# Altium PCB PCB1.PcbDoc
Units mm, origin at the board's own origin, x right, y up, seen from the top; angles counter-clockwise.
Board outline 73.13 x 48.2 mm, 2 copper layers (Top Layer, Bottom Layer); 14 components, 11 nets, 39 pads, 0 vias.
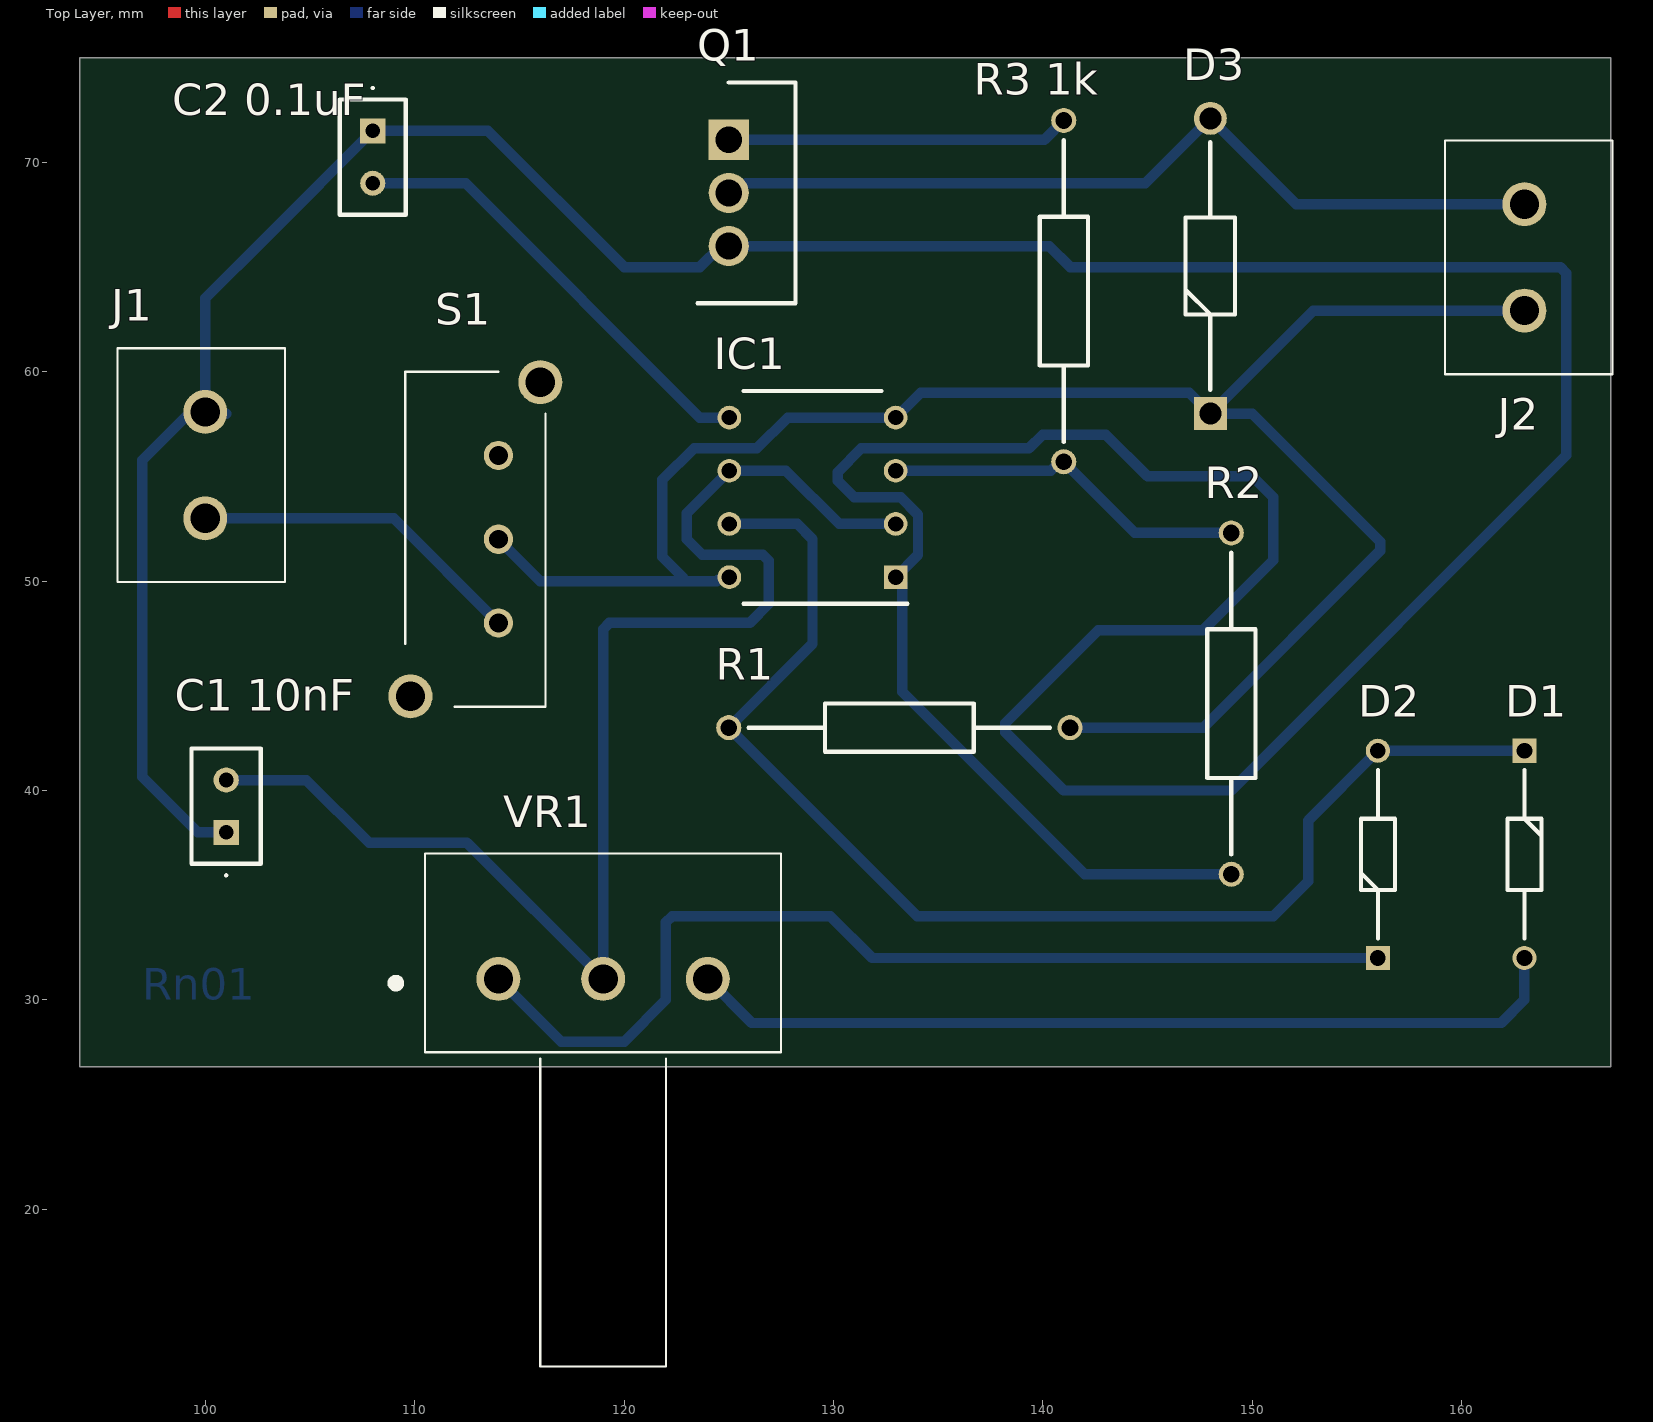
[diagram p0: Top Layer view]
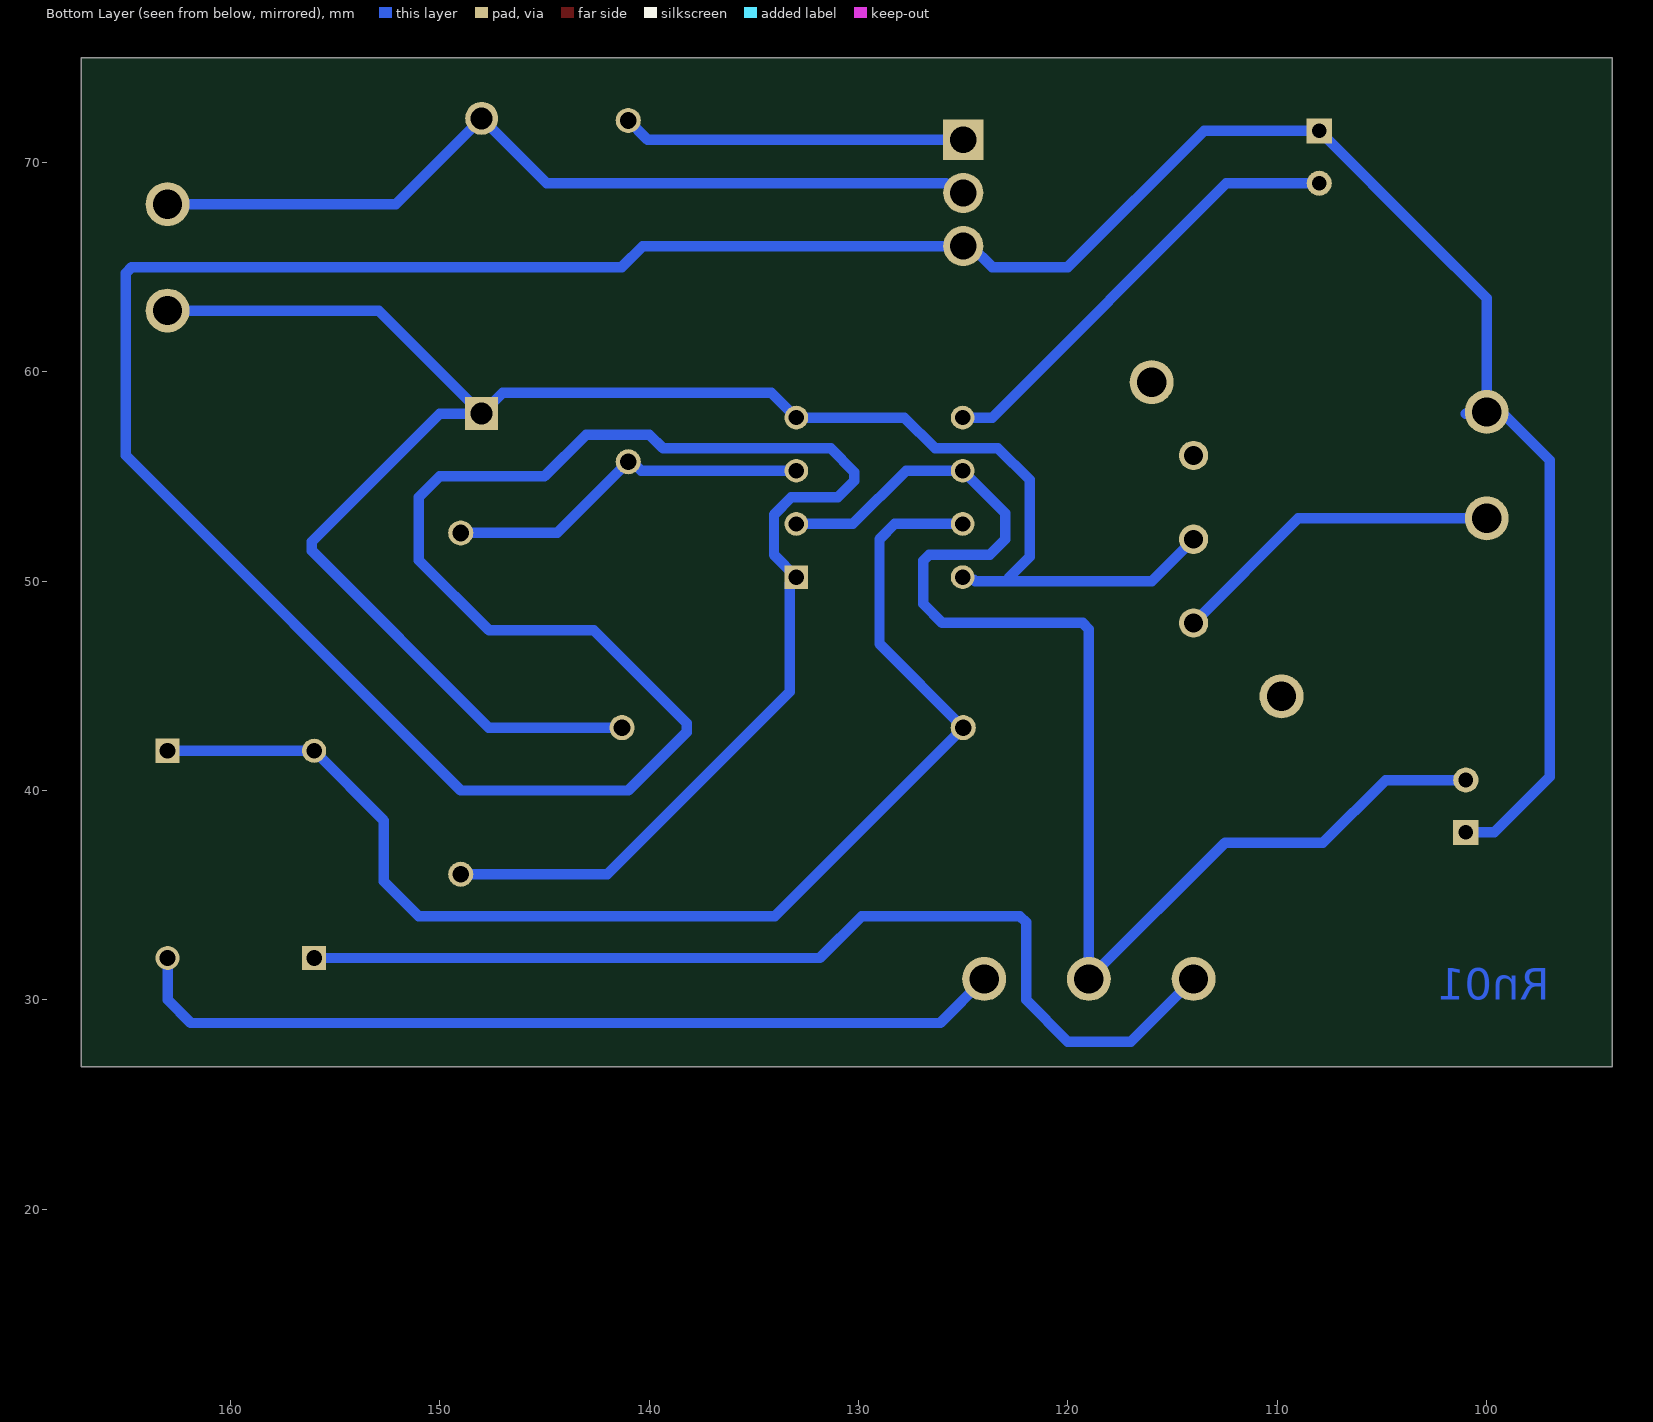
[diagram p1: Bottom Layer view, seen from below]
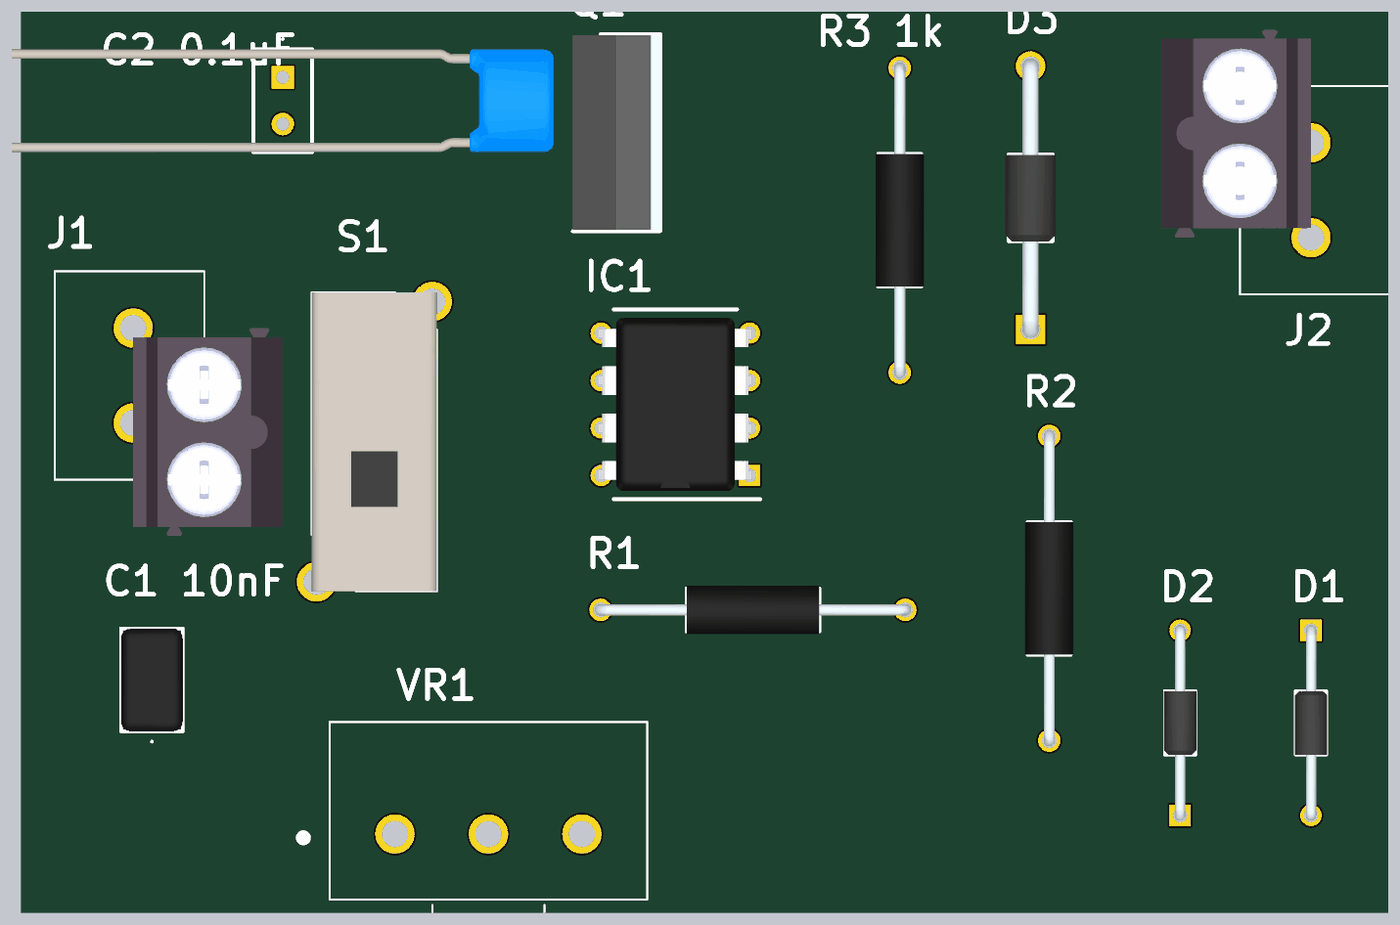
[diagram p2: 3D render of the assembled board from above, using the file's embedded part models]

## Layer stack, top to bottom
Top Solder: solder mask 0.0102, Solder Resist, Dk 3.5
Top Layer: signal copper 0.0356
Dielectric 1: dielectric 0.32, FR-4, Dk 4.8
Bottom Layer: signal copper 0.0356
Bottom Solder: solder mask 0.0102, Solder Resist, Dk 3.5

## Board outline
94,26.797 167.132,26.797 167.132,75 94,75

## Design rules (kind name [scope] priority, off if disabled: settings)
Clearance [All] p1: gap=0.254 ignorepadtopadclearanceinfootprint=FALSE
PolygonConnect [All] p1: connectstyle=Relief reliefconductorwidth=0.254 reliefentries=4 polygonreliefangle="90 Angle" airgapwidth=0.254
RoutingVias [All] p1: holewidth=0.711 width=1.27 viastyle="Through Hole" minholewidth=0.711 minwidth=1.27 maxholewidth=0.711 maxwidth=1.27
SilkToSolderMaskClearance [IsPad] p1: minsilkscreentomaskgap=0.1 clearancetoexposedcopper=TRUE
SolderMaskExpansion [All] p1: expansion=0.102 istentingtop=FALSE
SupplyNets "Schematic Supply Nets_1" [InNet('+12')] p1: voltage=0.000
SupplyNets "Schematic Supply Nets" [InNet('GND')] p2: voltage=0.000
Width [All] p1: maxlimit=1 minlimit=0.254 preferedwidth=0.5 minimp=50.000000 maximp=50.000000 favimp=50.000000
29 further rules are at their usual default settings.

## Components (designator, comment, footprint, x,y, rotation, side; value= is the part's Value field where it differs from the comment)
"C1 10nF" "RHS7J2D103J2DGH01A" RHS7J2D103J2DGH01A 101,38 r90 top
"C2 0.1uF" "RCE5C1H104J2A2H03B" RCE5C1H104J2A2H03B 108,71.5 r270 top
D1 "1N4148B" DIOAD990W55L340D162 163,41.9 r270 top
D2 "1N4148B" DIOAD990W55L340D162 156,32 r90 top
D3 "1N4007-T" DIOAD1408W86L464D236 148,58 r90 top
IC1 "LM555CN_NOPB" DIP794W53P254L959H508Q8N 129,54 r180 top
J1 "1760510000" 1760510000 100,58.08 r270 top
J2 "1760510000" 1760510000 163,62.92 r90 top
Q1 "IRFZ24NPBF" TO254P469X1042X1967-3P 125,71.08 r270 top
R1 "MF1_4DCT26A1001F" RESAD1630W60L710D230 125,43 r0 top
R2 "MF1_4DCT26A1001F" RESAD1630W60L710D230 149,52.3 r270 top
"R3 1k" "MF1_4DCT26A1001F" RESAD1630W60L710D230 141,55.7 r90 top
S1 "MHS12204" MHS12204 114,48 r270 top
VR1 "P160KN2-0EC15B50K" P160KN20EC15B50K 114,31 r0 top

## Footprints (in the part's own frame and the unit in brackets; to place one, negate y for a bottom-side part, rotate by r counter-clockwise, add the part's x,y. Pads: shape width x height; smd on the part's side, far side on the other; paste and mask are expansions set on the pad)
1760510000 [mm]
  round 2.1 hole 1.4: 1(0,0) 2(5.08,0)
  silkscreen extent -3.04,-4.2 8.12,3.8, body extent 0,0 11.11,8, height 13.5
DIOAD990W55L340D162 [mm]
  rect 1.15x1.15 hole 0.75: 1(0,0)
  round 1.15 hole 0.75: 2(9.9,0)
  silkscreen extent 0.92,-0.81 8.97,0.81, body extent -0.28,-0.87 10.18,0.87, height 1.75
DIOAD1408W86L464D236 [mm]
  rect 1.575x1.575 hole 1.05: 1(0,0)
  round 1.575 hole 1.05: 2(14.1,0)
  silkscreen extent 1.14,-1.18 12.96,1.18, body extent -0.43,-1.35 14.51,1.35, height 2.72
DIP794W53P254L959H508Q8N [mm]
  rect 1.13x1.13 hole 0.73: 1(-3.97,3.81)
  round 1.13 hole 0.73: 2(-3.97,1.27) 3(-3.97,-1.27) 4(-3.97,-3.81) 5(3.97,-3.81) 6(3.97,-1.27) 7(3.97,1.27) 8(3.97,3.81)
  silkscreen extent -4.54,-5.08 3.3,5.08, body extent -4.1,-4.64 4.1,4.64, height 4.21
MHS12204 [mm]
  round 1.4 hole 0.9: 1(0,0) 2(-4,0) 3(-8,0)
  round 2.1 hole 1.4: MH1(-11.5,2) MH2(3.5,-4.2)
  silkscreen extent -12,-4.45 4,2.25, body extent -12,-4.45 4,2.25, height 12.48
P160KN20EC15B50K [mm]
  round 2.1 hole 1.4: 1(0,0) 2(5,0) 3(10,0)
  silkscreen extent -5.1,-18.5 13.5,6
RCE5C1H104J2A2H03B [mm]
  rect 1.2x1.2 hole 0.7: 1(0,0)
  round 1.2 hole 0.7: 2(2.5,0)
  silkscreen extent -2.1,-1.57 4,1.58, body extent -1.5,-14.5 4,14.5, height 3.16
RESAD1630W60L710D230 [mm]
  round 1.2 hole 0.8: 1(0,0) 2(16.3,0)
  silkscreen extent 0.95,-1.15 15.35,1.15, body extent -0.3,-1.29 16.6,1.29, height 2.6
RHS7J2D103J2DGH01A [mm]
  rect 1.2x1.2 hole 0.7: 1(0,0)
  round 1.2 hole 0.7: 2(2.5,0)
  silkscreen extent -2.1,-1.65 4,1.65, body extent -1.5,-1.65 4,1.65, height 6.63
TO254P469X1042X1967-3P [mm]
  rect 1.92x1.92 hole 1.28: 1(0,0)
  round 1.92 hole 1.28: 2(2.54,0) 3(5.08,0)
  silkscreen extent -2.73,-1.49 7.81,3.2, body extent -2.67,-1.5 7.75,3.19, height 18.84

## Part data
"C1 10nF": "Capacitor", Manufacturer_Name="Murata Electronics", Mouser Part Number=81-RHS7J2D103J2DGH1A, Arrow Part Number=RHS7J2D103J2DGH01A, Arrow Price/Stock=https://www.arrow.com/en/products/rhs7j2d103j2dgh01a/murata-manufacturing?region=nac, Datasheet Link=https://psearch.en.murata.com/capacitor/product/RHS7J2D103J2DGH01A.html, Height=4mm, Manufacturer_Part_Number=RHS7J2D103J2DGH01A, Mouser Price/Stock=https://www.mouser.co.uk/ProductDetail/Murata-Electronics/RHS7J2D103J2DGH01A?qs=xhbEVWpZdWd37zfbUob1kg%3D%3D
"C2 0.1uF": "Capacitor", Manufacturer_Name="Murata Electronics", Mouser Part Number=81-RCE5C1H104J2A2H3B, Datasheet Link=https://psearch.en.murata.com/capacitor/product/RCE5C1H104J2A2H03B.html, Height=5.5mm, Manufacturer_Part_Number=RCE5C1H104J2A2H03B, Mouser Price/Stock=https://www.mouser.co.uk/ProductDetail/Murata-Electronics/RCE5C1H104J2A2H03B?qs=qSfuJ%252Bfl%2Fd7lCZVqlAdNaA%3D%3D
D1 D2: "Diode", Manufacturer_Name=Vishay, Datasheet Link=https://www.vishay.com/docs/81857/1n4148.pdf, Manufacturer_Part_Number=1N4148B
D3: "Diode", Manufacturer_Name=Vishay, Mouser Part Number=N/A, Datasheet Link=https://www.diodes.com/assets/Datasheets/ds28002.pdf, Manufacturer_Part_Number=1N4007-T, Mouser Price/Stock=https://www.mouser.co.uk/ProductDetail/Vishay-Semiconductors/1N4007-T?qs=vcNEnGV6fuVmsrABXSI4cw%3D%3D
IC1: "Integrated Circuit", Arrow Part Number=LM555CN/NOPB, Manufacturer_Name="Texas Instruments", Mouser Part Number=926-LM555CN/NOPB, Arrow Price/Stock=https://www.arrow.com/en/products/lm555cnnopb/texas-instruments?region=nac, Datasheet Link=https://datasheet.datasheetarchive.com/originals/distributors/Datasheets-SFU2/DSASFU100035550.pdf, Height=5.08mm, Manufacturer_Part_Number=LM555CN/NOPB, Mouser Price/Stock=https://www.mouser.co.uk/ProductDetail/Texas-Instruments/LM555CN-NOPB?qs=QbsRYf82W3GjZpQL%2FakZOg%3D%3D
J1 J2: "Connector", Manufacturer_Name=Weidmuller, Mouser Part Number=470-1760510000, Datasheet Link=http://catalog.weidmueller.com/createDatasheetForMobile.do?ordernumber=1760510000&scope1=1&scope2=1&localeId=en, Height=10mm, Manufacturer_Part_Number=1760510000, Mouser Price/Stock=https://www.mouser.co.uk/ProductDetail/Weidmuller/1760510000?qs=BTG2th8YmhTa8qcglSF3eg%3D%3D
Q1: "MOSFET (N-Channel)", Manufacturer_Name=Infineon, Mouser Part Number=942-IRFZ24NPBF, Arrow Part Number=IRFZ24NPBF, Arrow Price/Stock=https://www.arrow.com/en/products/irfz24npbf/infineon-technologies-ag?utm_currency=USD&region=europe, Datasheet Link=https://www.mouser.com/datasheet/2/196/irfz24npbf-1227512.pdf, Height=4.69mm, Manufacturer_Part_Number=IRFZ24NPBF, Mouser Price/Stock=https://www.mouser.co.uk/ProductDetail/Infineon-Technologies/IRFZ24NPBF?qs=9%252BKlkBgLFf0TQgSTtY4J0g%3D%3D
R1 R2 "R3 1k": "Resistor", Manufacturer_Name="KOA Speer", Manufacturer_Part_Number=MF1/4DCT26A1001F, Mouser Part Number=660-MF1/4DCT26A1001F, Datasheet Link=https://componentsearchengine.com/Datasheets/1/MF1_4DCT26A1001F.pdf, Mouser Price/Stock=https://www.mouser.co.uk/ProductDetail/KOA-Speer/MF1-4DCT26A1001F?qs=wVGympPcmnD9Oav1Pii0SQ%3D%3D
S1: "Switch", Manufacturer_Name="TE Connectivity", Mouser Part Number=506-MHS12204, Arrow Part Number=MHS12204, Arrow Price/Stock=https://www.arrow.com/en/products/mhs12204/te-connectivity?region=nac, Datasheet Link=https://www.te.com/commerce/DocumentDelivery/DDEController?Action=srchrtrv&DocNm=1825255&DocType=Customer+Drawing&DocLang=English&DocFormat=pdf&PartCntxt=1825255-1, Height=12mm, Manufacturer_Part_Number=MHS12204, Mouser Price/Stock=https://www.mouser.co.uk/ProductDetail/TE-Connectivity-Alcoswitch/MHS12204?qs=x%2FgbKjZ2T%2FPUluB%2FWhqq0Q%3D%3D
VR1: "Variable Resistor", Manufacturer_Name="TT Electronics", Mouser Part Number=858-P160KN20EC15B50K, Arrow Part Number=P160KN2-0EC15B50K, Arrow Price/Stock=https://www.arrow.com/en/products/p160kn2-0ec15b50k/bi-technologies?utm_currency=USD&region=nac, Datasheet Link=https://componentsearchengine.com/Datasheets/1/P160KN2-0EC15B50K.pdf, Height=26.5mm, Manufacturer_Part_Number=P160KN2-0EC15B50K, Mouser Price/Stock=https://www.mouser.co.uk/ProductDetail/BI-Technologies-TT-Electronics/P160KN2-0EC15B50K?qs=%252BUYXD5bnyXpltOSO%252Bi0suQ%3D%3D

## Nets (pads, with @x,y where several pads share a name; then routed paths per layer and width w, separated by ;. In a path a pad name is that pad's centre, name@x,y a point inside that pad or via, vN(x,y) a via of type N, cw(c..) or ccw(c..) an arc to the next point about the centre after c; other vN are vias at no path point)
+12: D3.1 IC1.4 IC1.8 J2.1 R1.2 S1.2 | length 91.7
  Bottom Layer w0.5: S1.2 116,50 122.81,50 124.422,50 124.492,50.069 124.909,50.069 IC1.8 ; 122.81,50.19 121.833,51.167 121.833,54.833 123.345,56.345 126.345,56.345 127.81,57.81 IC1.4 134.16,59 147,59 D3.1 ; R1.2 147.664,43 156.125,51.461 156.125,51.875 150,58 D3.1 ; J2.1 152.92,62.92 D3.1
GND: "C1 10nF.1" "C2 0.1uF.1" IC1.1 J1.1 Q1.3 R2.2 | length 221.3
  Bottom Layer w0.5: J1.1@99.724,58 99.221,58 97,55.779 97,40.65 99.65,38 101,38 ; J1.1@99.724,58.08 J1.1 100,63.5 102.982,66.482 108,71.5 113.5,71.5 120,65 123.616,65 124.616,66 Q1.3 140.309,66 141.309,65 164.707,65 165,64.707 165,56 149,40 141,40 138.207,42.793 138.207,43.207 142.65,47.65 147.65,47.65 151,51 151,54 150,55 145,55 143,57 140,57 139.339,56.339 131.339,56.339 130.207,55.207 130.207,54.793 131,54 133.212,54 134.039,53.173 134.039,51.259 IC1.1 133.285,49.875 133.285,44.715 142,36 R2.2 ; J1.1@100,58 J1.1@101,58
"NetC1 10nF_2": "C1 10nF.2" IC1.2 IC1.6 VR1.2 | length 66.6
  Bottom Layer w0.5: 101,40.5 104.83,40.5 107.83,37.5 112.5,37.5 VR1.2 119,47.707 119.293,48 126,48 126.917,48.917 126.917,50.966 126.624,51.259 123.741,51.259 123,52 123,53.24 IC1.6 127.73,55.27 130.27,52.73 IC1.2
"NetC2 0.1uF_2": "C2 0.1uF.2" IC1.5 | length 21.7
  Bottom Layer w0.5: 108,69 112.429,69 123.619,57.81 IC1.5
NetD1_1: D1.1 D2.2 IC1.7 R1.1 | length 61.6
  Bottom Layer w0.5: IC1.7 128.27,52.73 129,52 129,47 R1.1 134,34 151,34 152.666,35.666 152.666,38.566 D2.2 D1.1
NetD1_2: D1.2 VR1.3 | length 42.3
  Bottom Layer w0.5: VR1.3 126.104,28.896 161.896,28.896 163,30 D1.2
NetD2_1: D2.1 VR1.1 | length 48.7
  Bottom Layer w0.5: VR1.1 117,28 120,28 122,30 122,33.707 122.293,34 129.851,34 131.851,32 D2.1
NetD3_2: D3.2 J2.2 Q1.2 | length 41.2
  Bottom Layer w0.5: Q1.2 125.384,68.54 125.844,69 144.9,69 D3.2 152.1,68 J2.2
NetIC1_3: "R3 1k.1" IC1.3 R2.1 | length 17.6
  Bottom Layer w0.5: IC1.3 140.381,55.27 140.811,55.7 141,55.7 144.4,52.3 R2.1
NetJ1_2: J1.2 S1.1 | length 16.1
  Bottom Layer w0.5: J1.2 109,53 S1.1
NetQ1_1: "R3 1k.2" Q1.1 | length 16.4
  Bottom Layer w0.5: Q1.1 140.08,71.08 141,72
pads on no net: S1.3 S1.MH1 S1.MH2

## Other copper
Bottom Layer:
  text "Rn01" at 97,30 h1.52